# Altium PCB Cross.PcbDoc
Units mm, origin at the board's own origin, x right, y up, seen from the top; angles counter-clockwise.
Board outline 75.2 x 49 mm, 2 copper layers (Top Layer 1, Bottom Layer 1), stack 0.532 mm thick; 4 components, 30 nets, 132 pads, 0 vias.
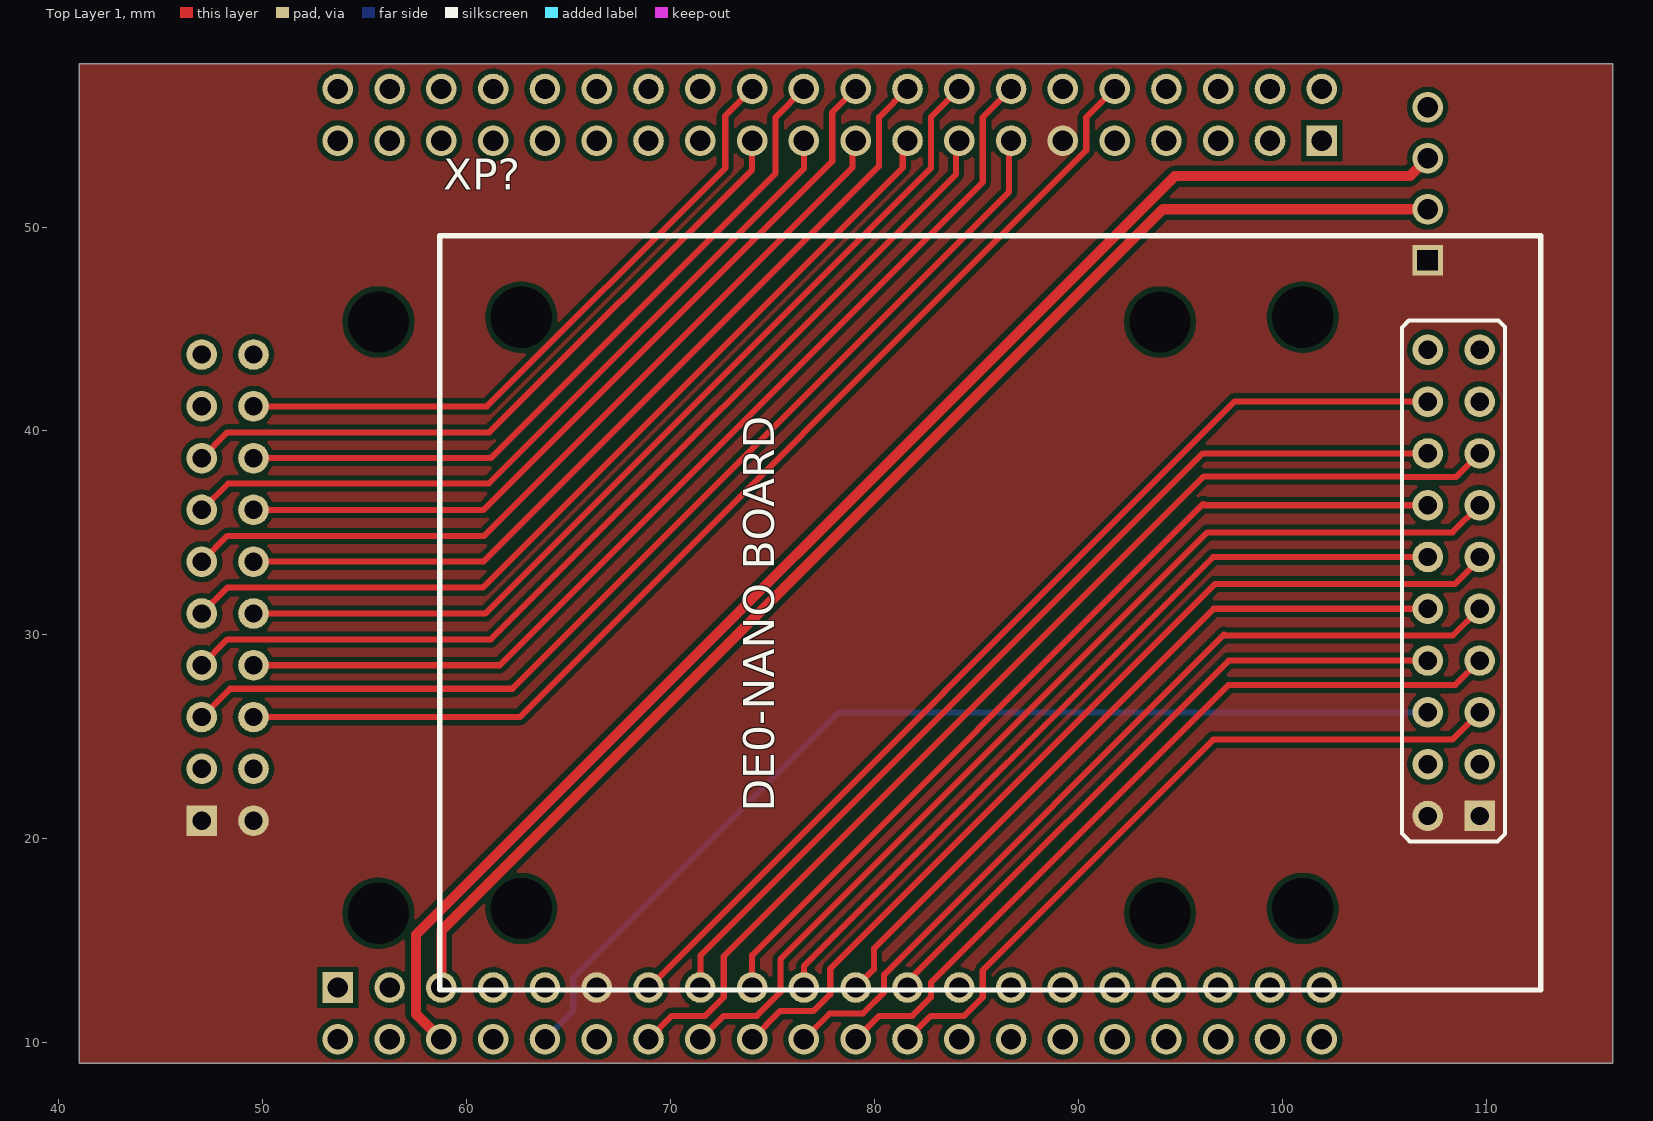
[diagram p0: Top Layer 1 view]
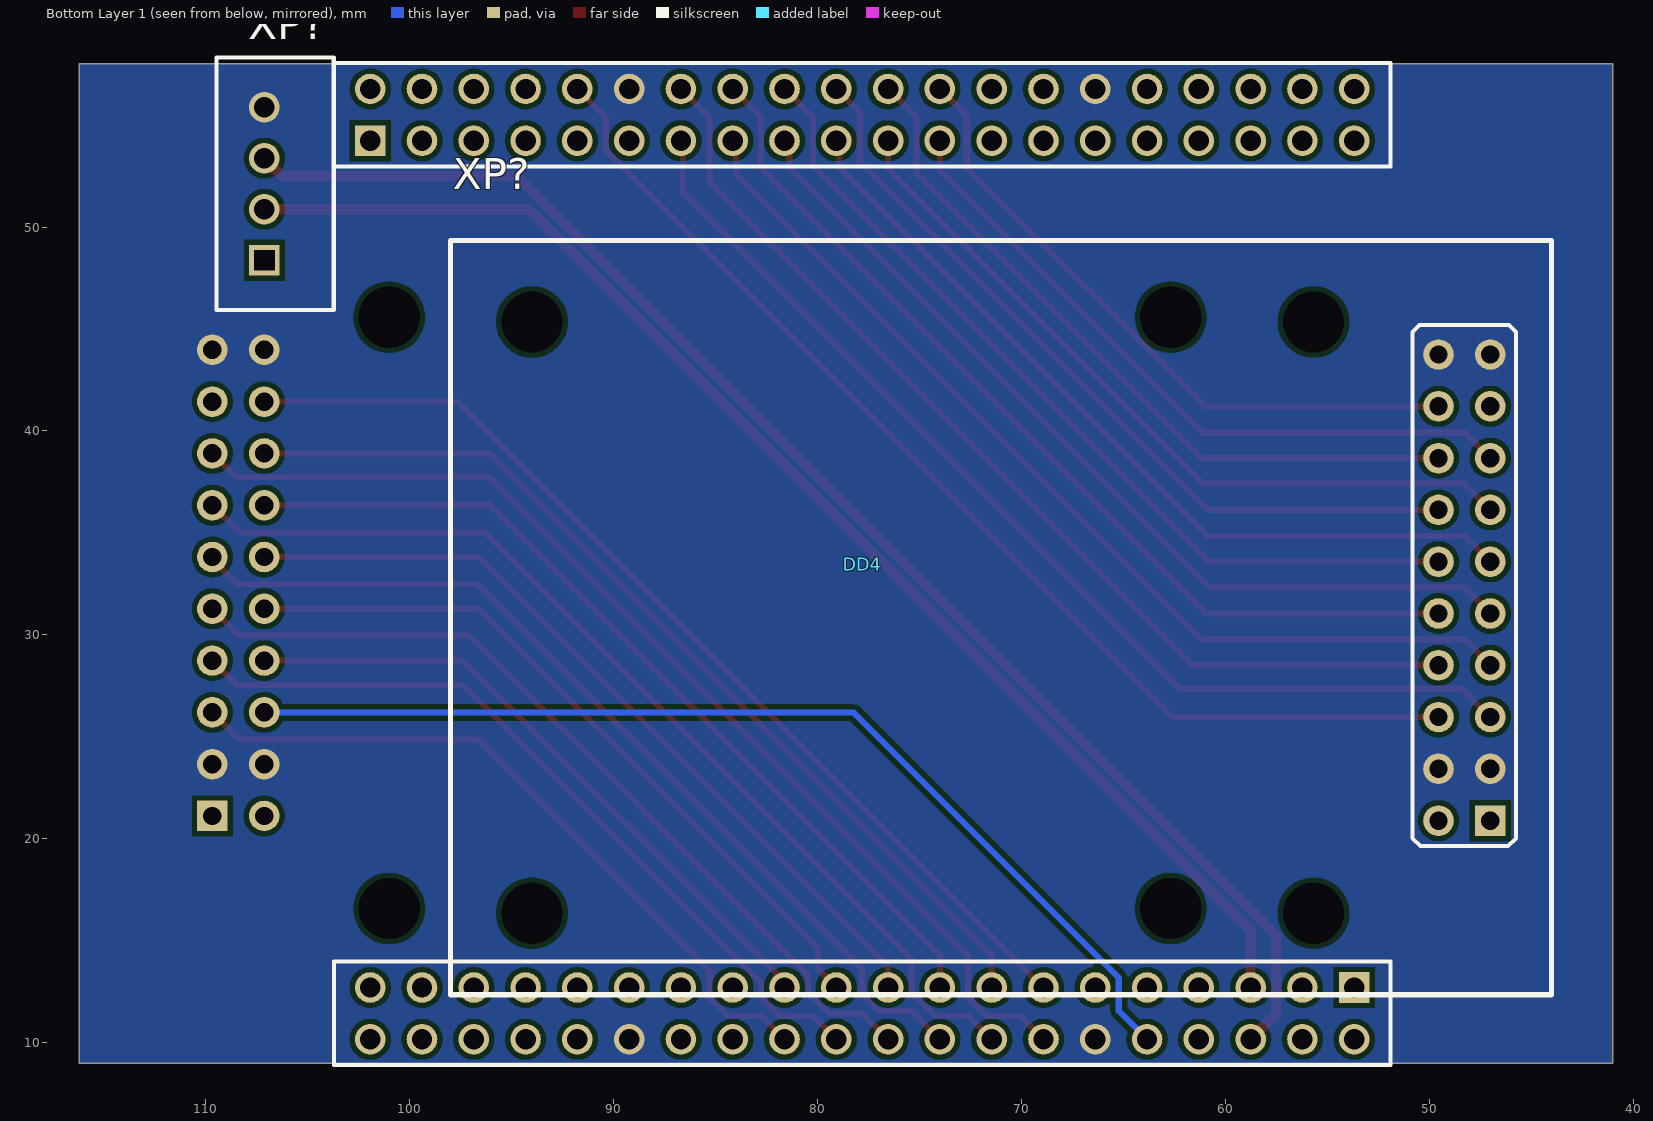
[diagram p1: Bottom Layer 1 view, seen from below]

## Layer stack, top to bottom
Top Solder: solder mask 0.0102, Solder Resist, Dk 3.5
Top Layer 1: signal copper 0.035
Dielectric 2: prepreg 0.0711, PP-006, Dk 4.1
Dielectric 1: dielectric 0.32, FR-4, Dk 4.8
Dielectric 3: prepreg 0.0711, PP-006, Dk 4.1
Bottom Layer 1: signal copper 0.035
Bottom Solder: solder mask 0.0102, Solder Resist, Dk 3.5

## Board outline
41,9 41,58 116.2,58 116.2,9

## Design rules (kind name [scope] priority, off if disabled: settings)
Clearance [All] p1: gap=0.25 ignorepadtopadclearanceinfootprint=FALSE except(0.2: Arc-Arc Arc-Track Arc-SMDPad Track-Track Track-SMDPad SMDPad-SMDPad)
ComponentClearance [InComponent('DD4') vs InComponent('L1')] p1: gap=-100 collisioncheckmode=3 verticalgap=2540 showdistances=FALSE
HoleSize [All] p1: absolutevalues=TRUE maxlimit=5 minlimit=0.2 maxpercent=80.000 minpercent=20.000
HoleToHoleClearance [All] p1: gap=0.25 allowstackedmicrovias=TRUE
MinimumSolderMaskSliver [All] p1: minsoldermaskwidth=0.1
PolygonConnect [All] p1: connectstyle=Direct reliefconductorwidth=0.254 reliefentries=4 polygonreliefangle="90 Angle" airgapwidth=0.254
RoutingVias [All] p1: holewidth=0.3 width=0.6 viastyle="Through Hole" minholewidth=0.3 minwidth=0.6 maxholewidth=0.4 maxwidth=0.8
SilkToSolderMaskClearance [IsPad] p1: minsilkscreentomaskgap=0 clearancetoexposedcopper=TRUE
SolderMaskExpansion [All] p1: expansion=0.102 istentingtop=FALSE
Width [All] p1: maxlimit=10 minlimit=0.25 preferedwidth=0.3 minimp=50.000000 maximp=50.000000 favimp=50.000000
25 further rules are at their usual default settings.

## Classes and differential pairs
component class DE0-Nano: DD4 XP?

## Components (designator, comment, footprint, x,y, rotation, side; value= is the part's Value field where it differs from the comment)
DD4 "DE0-nano" DE0-nano-Footprint-1 43.015,8.515 r90 bottom
XP? "CWF-4" CWF-4 107.125,48.375 r90 bottom
XP? "ADC_Module" ADC_MODULE 112.675,12.58 r180 top value="ADC Module"
XP? "ADC_Module" ADC_MODULE 44,12.35 r0 bottom value="ADC Module"

## Footprints (in the part's own frame and the unit in brackets; to place one, negate y for a bottom-side part, rotate by r counter-clockwise, add the part's x,y. Pads: shape width x height; smd on the part's side, far side on the other; paste and mask are expansions set on the pad)
ADC_MODULE [mm]
  rect 1.5x1.5 hole 0.9: 1(3,-8.54)
  round 1.5 hole 0.9: 2(5.54,-8.54) 3(3,-11.08) 4(5.54,-11.08) 5(3,-13.62) 6(5.54,-13.62) 7(3,-16.16) 8(5.54,-16.16) 9(3,-18.7) 10(5.54,-18.7) 11(3,-21.24) 12(5.54,-21.24) 13(3,-23.78) 14(5.54,-23.78) 15(3,-26.32) 16(5.54,-26.32) 17(3,-28.86) 18(5.54,-28.86) 19(3,-31.4) 20(5.54,-31.4)
  round 1.524 hole 3: ""(11.67,-4) ""(11.67,-33) ""(50,-4) ""(50,-33)
  silkscreen extent 0,-37 54,0, body extent 1.73,-32.67 6.81,-7.27, height 8.44
CWF-4 [mm]
  rect 1.5x1.5 hole 1 square: 1(0,0)
  round 1.5 hole 1: 2(2.5,0) 3(5,0) 4(7.5,0)
  silkscreen extent -2.45,-3.4 9.95,2.35, body extent -2.4,-3.53 10,2.22, height 7
DE0-nano-Footprint-1 [mm]
  rect 1.5x1.5 hole 1: 1A(4.19,10.66) 1B(45.72,58.92)
  round 1.5 hole 1: 2A(1.65,10.66) 2B(48.26,58.92) 3A(4.19,13.2) 3B(45.72,56.38) 4A(1.65,13.2) 4B(48.26,56.38) 5A(4.19,15.74) 5B(45.72,53.84) 6A(1.65,15.74) 6B(48.26,53.84) 7A(4.19,18.28) 7B(45.72,51.3) 8A(1.65,18.28) 8B(48.26,51.3) 9A(4.19,20.82) 9B(45.72,48.76) 10A(1.65,20.82) 10B(48.26,48.76) 11A(4.19,23.36) 11B(45.72,46.22) 12A(1.65,23.36) 12B(48.26,46.22) 13A(4.19,25.9) 13B(45.72,43.68) 14A(1.65,25.9) 14B(48.26,43.68) 15A(4.19,28.44) 15B(45.72,41.14) 16A(1.65,28.44) 16B(48.26,41.14) 17A(4.19,30.98) 17B(45.72,38.6) 18A(1.65,30.98) 18B(48.26,38.6) 19A(4.19,33.52) 19B(45.72,36.06) 20A(1.65,33.52) 20B(48.26,36.06) 21A(4.19,36.06) 21B(45.72,33.52) 22A(1.65,36.06) 22B(48.26,33.52) 23A(4.19,38.6) 23B(45.72,30.98) 24A(1.65,38.6) 24B(48.26,30.98) 25A(4.19,41.14) 25B(45.72,28.44) 26A(1.65,41.14) 26B(48.26,28.44) 27A(4.19,43.68) 27B(45.72,25.9) 28A(1.65,43.68) 28B(48.26,25.9) 29A(4.19,46.22) 29B(45.72,23.36) 30A(1.65,46.22) 30B(48.26,23.36) 31A(4.19,48.76) 31B(45.72,20.82) 32A(1.65,48.76) 32B(48.26,20.82) 33A(4.19,51.3) 33B(45.72,18.28) 34A(1.65,51.3) 34B(48.26,18.28) 35A(4.19,53.84) 35B(45.72,15.74) 36A(1.65,53.84) 36B(48.26,15.74) 37A(4.19,56.38) 37B(45.72,13.2) 38A(1.65,56.38) 38B(48.26,13.2) 39A(4.19,58.92) 39B(45.72,10.66) 40A(1.65,58.92) 40B(48.26,10.66)
  silkscreen extent 0.38,8.88 49.53,60.7

## Part data
DD4: library part CMP-020-00023-4, "Compact-sized FPGA development platform"
XP?: Case=корпус, Manufactore=Connfly, Value1={Value1}, Value2={Value2}, Value3={Value3}, Value4={Value4}, Datasheet=https://lib.chipdip.ru/413/DOC001413777.pdf, Notice="Вилка-мама 4 пина, шаг 2.5мм", Rate="500В AC 1min", Shop=https://www.chipdip.ru/product/cwf-4
XP? XP?: Manufacturer=Connfly, Value1=+5, Value3=GND, Value5=D0, Value6=CLK, Value7=D2, Value8=D1, Value10=D3, Value11=D6, Value12=D5, Value13=D8, Value14=D7, Value15=D10, Value16=D9, D2=D4, Datasheet=https://lib.chipdip.ru/227/DOC000227157.pdf, Notice="Вилка штырьевая 16 пинов, шаг 2,54мм", Rate="500В AC 1min", Shop=https://www.chipdip.ru/product/pls-16, Value2=+5, Value4=GND

## Nets (pads, with @x,y where several pads share a name; then routed paths per layer and width w, separated by ;. In a path a pad name is that pad's centre, name@x,y a point inside that pad or via, vN(x,y) a via of type N, cw(c..) or ccw(c..) an arc to the next point about the centre after c; other vN are vias at no path point)
5V: DD4.11A DD4.11B XP?.1 XP?.2@49.54,20.89 XP?.2@107.135,21.12
CLK1: DD4.10A XP?.6@107.135,26.2 | length 51.6
  Bottom Layer 1 w0.3: DD4.10A 63.835,10.09 64,9.925 64,10.33 65.225,11.555 65.225,13.181 78.244,26.2 XP?.6@107.337,26.2
CLK2: DD4.10B XP?.6@49.54,25.97 | length 55.9
  Top Layer 1 w0.3: XP?.6@49.54,25.97 62.596,25.97 90.385,53.759 90.385,55.385 DD4.10B
D00: DD4.24A XP?.5@109.675,26.2 | length 35.5
  Top Layer 1 w0.3: DD4.24A 82.765,11.315 84.391,11.315 85.305,12.229 85.305,13.555 96.613,24.863 108.338,24.863 XP?.5@109.675,26.2
D01: DD4.23A XP?.8@107.135,28.74 | length 32.3
  Top Layer 1 w0.3: DD4.23A 81.615,12.99 97.365,28.74 XP?.8@107.135,28.74
D02: DD4.22A XP?.7@109.675,28.74 | length 38.7
  Top Layer 1 w0.3: DD4.22A 80.225,11.315 81.851,11.315 82.765,12.229 82.765,12.941 97.374,27.55 108.485,27.55 XP?.7@109.675,28.74
D03: DD4.21A XP?.10@107.135,31.28 | length 36.4
  Top Layer 1 w0.3: DD4.21A 79.965,13.595 79.965,14.615 96.63,31.28 XP?.10@107.135,31.28
D04: DD4.20A XP?.9@109.675,31.28 | length 42.4
  Top Layer 1 w0.3: DD4.20A 77.802,11.432 79.428,11.432 80.465,12.469 80.465,13.34 97.134,30.009 97.167,29.975 108.37,29.975 XP?.9@109.675,31.28
D05: DD4.19A XP?.12@107.135,33.82 | length 40
  Top Layer 1 w0.3: DD4.19A 76.535,13.746 96.609,33.82 XP?.12@107.135,33.82
D06: DD4.18A XP?.11@109.675,33.82 | length 46.3
  Top Layer 1 w0.3: DD4.18A 75.385,11.555 77.011,11.555 77.825,12.369 77.825,13.625 96.7,32.5 108.475,32.5 109.675,33.7 XP?.11@109.675,33.82
D07: DD4.17A XP?.14@107.135,36.36 | length 43.9
  Top Layer 1 w0.3: DD4.17A 73.995,14.295 96.128,36.428 96.196,36.36 XP?.14@107.135,36.36
D08: DD4.16A XP?.13@109.675,36.36 | length 50.4
  Top Layer 1 w0.3: DD4.16A@71.275,10.425 71.455,10.245 DD4.16A 72.605,11.315 74.231,11.315 75.385,12.469 75.385,14.085 96.325,35.025 108.34,35.025 XP?.13@109.675,36.36
D09: DD4.15A XP?.16@107.135,38.9 | length 47.4
  Top Layer 1 w0.3: DD4.15A 71.455,14.269 96.086,38.9 XP?.16@107.135,38.9
D10: DD4.14A XP?.15@109.675,38.9 | length 53.9
  Top Layer 1 w0.3: DD4.14A 70.065,11.315 71.691,11.315 72.605,12.229 72.605,14.23 96.15,37.775 105.925,37.775 105.95,37.75 108.525,37.75 XP?.15@109.675,38.9
D11: DD4.13A XP?.18@107.135,41.44 | length 50.3
  Top Layer 1 w0.3: DD4.13A 68.915,12.91 68.875,12.95 69.16,12.95 97.65,41.44 XP?.18@107.135,41.44
D18: DD4.13B XP?.5@47,25.97 | length 52.8
  Top Layer 1 w0.3: XP?.5@47,25.97 48.39,27.36 62.235,27.36 86.591,51.716 86.591,54.131 DD4.13B
D19: DD4.14B XP?.8@49.54,28.51 | length 50.7
  Top Layer 1 w0.3: XP?.8@49.54,28.51 61.61,28.51 85.305,52.205 85.305,55.385 DD4.14B
D110: DD4.15B XP?.7@47,28.51 | length 48.7
  Top Layer 1 w0.3: XP?.7@47,28.51 48.265,29.775 61.175,29.775 83.996,52.596 83.996,54.076 DD4.15B
D111: DD4.16B XP?.10@49.54,31.05 | length 46.7
  Top Layer 1 w0.3: XP?.10@49.54,31.05 60.925,31.05 82.765,52.89 82.765,55.385 DD4.16B
D112: DD4.17B XP?.9@47,31.05 | length 44.9
  Top Layer 1 w0.3: XP?.9@47,31.05 48.265,32.315 60.79,32.315 81.385,52.91 81.385,54.005 DD4.17B
D113: DD4.18B XP?.12@49.54,33.59 | length 43.1
  Top Layer 1 w0.3: XP?.12@49.54,33.59 60.815,33.59 80.225,53 80.225,55.385 DD4.18B
D114: DD4.19B XP?.11@47,33.59 | length 41.3
  Top Layer 1 w0.3: XP?.11@47,33.59 48.265,34.855 60.855,34.855 78.925,52.925 78.925,54.085 DD4.19B
D115: DD4.20B XP?.14@49.54,36.13 | length 39.5
  Top Layer 1 w0.3: XP?.14@49.54,36.13 60.83,36.13 77.925,53.225 77.925,55.625 DD4.20B
D116: DD4.21B XP?.13@47,36.13 | length 37.8
  Top Layer 1 w0.3: XP?.13@47,36.13 48.295,37.425 61.089,37.425 76.535,52.871 DD4.21B
D117: DD4.22B XP?.16@49.54,38.67 | length 36.1
  Top Layer 1 w0.3: XP?.16@49.54,38.67 61.17,38.67 75.145,52.645 75.145,55.385 DD4.22B
D118: DD4.23B XP?.15@47,38.67 | length 34.3
  Top Layer 1 w0.3: XP?.15@47,38.67 48.265,39.935 61.11,39.935 73.995,52.82 DD4.23B
D119: DD4.24B XP?.18@49.54,41.21 | length 32.4
  Top Layer 1 w0.3: XP?.18@49.54,41.21 60.992,41.21 72.675,52.893 72.675,55.455 DD4.24B
GND: DD4.12A DD4.12B DD4.30A DD4.30B XP?.3@47,23.43 XP?.3@109.675,23.66 XP?.4 XP?.19 XP?.20
RX: DD4.5A XP?.2@107.125,50.875 | length 66.1
  Top Layer 1 w0.5: DD4.5A 58.755,15.488 94.142,50.875 XP?.2@107.432,50.875
TX: DD4.6A XP?.3@107.125,53.375 | length 71
  Top Layer 1 w0.5: DD4.6A 57.505,11.415 57.505,15.28 94.725,52.5 106.25,52.5 XP?.3@107.125,53.375
pads on no net: DD4.1A DD4.1B DD4.2A DD4.2B DD4.3A DD4.3B DD4.4A DD4.4B DD4.5B DD4.6B DD4.7A DD4.7B DD4.8A DD4.8B DD4.9A DD4.9B DD4.25A DD4.25B DD4.26A DD4.26B DD4.27A DD4.27B DD4.28A DD4.28B DD4.29A DD4.29B DD4.31A DD4.31B DD4.32A DD4.32B DD4.33A DD4.33B DD4.34A DD4.34B DD4.35A DD4.35B DD4.36A DD4.36B DD4.37A DD4.37B DD4.38A DD4.38B DD4.39A DD4.39B DD4.40A DD4.40B XP?. XP?.17

## Polygon pours and split planes (outlines as drawn)
5V on Top Layer 1 "5V_L01_P000" (solid, pour order 0): 41,9 41,58 116.2,58 116.2,9
GND on Bottom Layer 1 "GND_L02_P001" (solid, pour order 1): 41,9 41,58 116.2,58 116.2,9

## Silkscreen, mask and mechanical layers (free items; w line width, h text height)
Top Overlay:
  text "DE0-NANO BOARD" at 75.071,21.329 h1.52 r90
Top Assembly:
  lines w0.013: -0.044,67.286 -0.044,67.955 -0.044,68 ; 163.197,67.287 163.197,68
  lines w0.254: 41,9 116.2,9 116.2,58 41,58 41,9
Board outline:
  circle w0.013: c161.077,11.167 r1.6